# EAGLE board gat8 rev 1 (EAGLE 6.1)
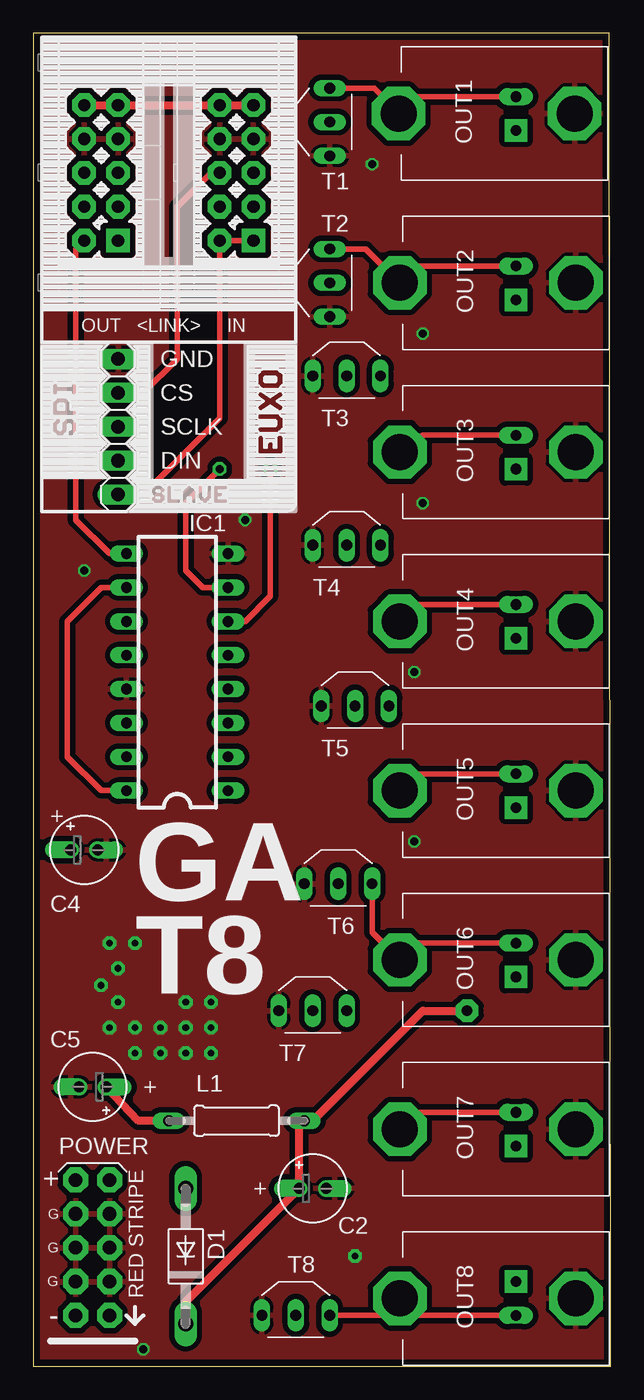
[diagram p0: board, top side]
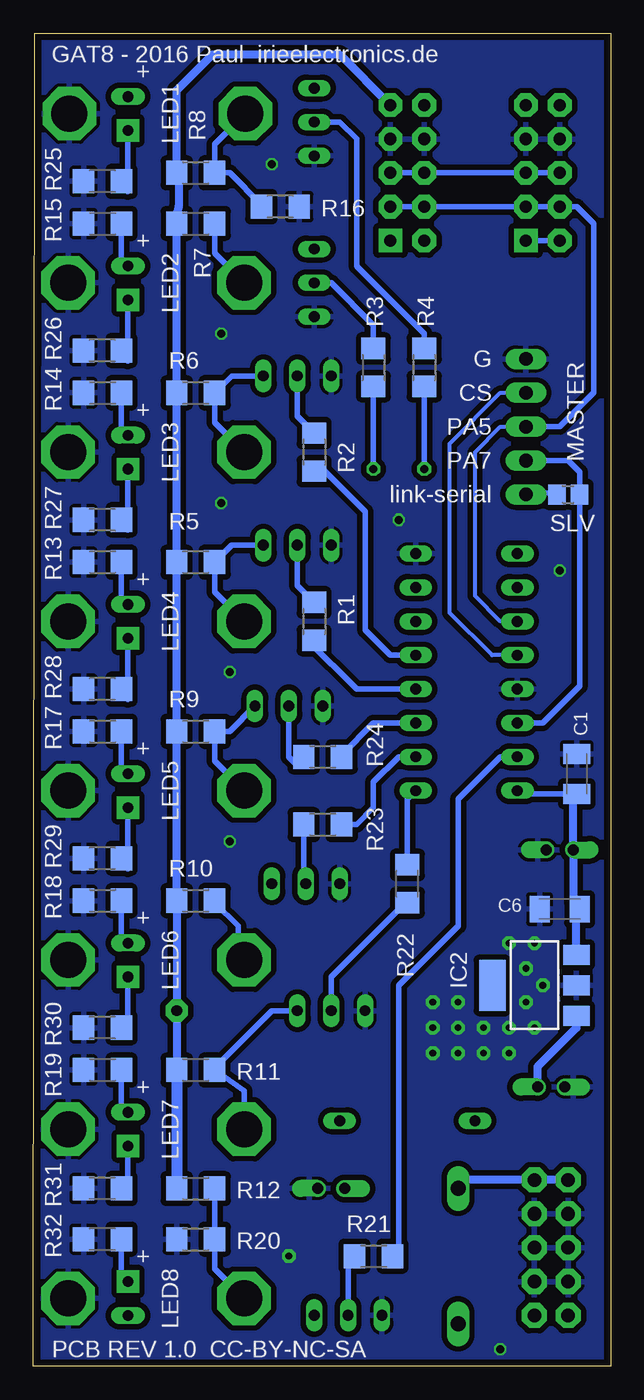
[diagram p1: board, bottom side, seen from below]

Size 43.29 x 100 mm. Coordinates in mm from the lower left corner, seen from the top.
Outline: 0,0 43.29,0 43.19,100 0,100 0,0
Copper layers (1*2*15*16): Top 0.035mm / dielectric 0.2mm / Route2 0.035mm / dielectric 1.2mm / Route15 0.035mm / dielectric 0.2mm / Bottom 0.035mm
Design rules: minimum track width 6mil, minimum drill 12mil, track to track 6mil, track to pad 8mil, pad to pad 12mil, via to via 6mil, smd to smd 0mil, copper to edge 20mil, drill to drill 10mil, minimum pad ring 6mil, minimum via ring 6mil, stop-mask expansion 0mil, vias tented up to drill 100mil, thermal gap 10mil

## Footprints (pad centres in the part's own frame; a part is rotated, then mirrored left to right if it is on the bottom)
C1206K = smd 1.5 x 2: 1 -1.5,0; 2 1.5,0
E2-5 = drill 0.813 pad 1.27 offset: + -1.016,0; - 1.016,0
DO41-10 = drill 1.118 long: A 5.08,0; C -5.08,0
DIL16 = drill 0.813 long: 1 -8.89,-3.81; 2 -6.35,-3.81; 3 -3.81,-3.81; 4 -1.27,-3.81; 5 1.27,-3.81; 6 3.81,-3.81; 7 6.35,-3.81; 8 8.89,-3.81; 9 8.89,3.81; 10 6.35,3.81; 11 3.81,3.81; 12 1.27,3.81; 13 -1.27,3.81; 14 -3.81,3.81; 15 -6.35,3.81; 16 -8.89,3.81
SOT223 = smd 1.5 x 2: 1 -2.3,-3.15; 2 0,-3.15; 3 2.3,-3.15 | smd 3.8 x 2: 4 0,3.15
ML10 = drill 0.914 pad 1.778 square: 1 -5.08,-1.27 | drill 0.914 pad 1.778 octagon: 2 -5.08,1.27; 3 -2.54,-1.27; 4 -2.54,1.27; 5 0,-1.27; 6 0,1.27; 7 2.54,-1.27; 8 2.54,1.27; 9 5.08,-1.27; 10 5.08,1.27
0207/10 = drill 0.813 long: 1 -5.08,0; 2 5.08,0
LED = drill 0.8 pad 1.676 square: GND 0,1.27 | drill 0.8 pad 1.27 long: S 0,-1.27
1X05 = drill 1.016 long: 1 -5.08,0; 2 -2.54,0; 3 0,0; 4 2.54,0; 5 5.08,0
PJ302M = drill 2.7 pad 4 octagon: GND 2.5,0; S 15.7,0
EURO_PWR_HEADER_FAT = drill 1.016 pad 1.88 octagon: 1 -5.08,-1.27; 2 -5.08,1.27; 3 -2.54,-1.27; 4 -2.54,1.27; 5 0,-1.27; 6 0,1.27; 7 2.54,-1.27; 8 2.54,1.27; 9 5.08,-1.27; 10 5.08,1.27
R1206 = smd 1.6 x 1.803: 1 -1.422,0; 2 1.422,0
R0805 = smd 1.3 x 1.5: 1 -0.85,0; 2 0.85,0
TO92 = drill 0.813 long: 1 2.54,0; 2 0,0; 3 -2.54,0

## Placement (x,y rotation side)
C1  100nF  [C1206K]  2.54,44.45 90 bottom
C2  47uF  [E2-5]  20.96,13.34 0 top
C4  47uF  [E2-5]  3.81,38.73 0 top
C5  47uF  [E2-5]  4.45,20.95 180 top
C6  100nF  [C1206K]  3.81,34.29 180 bottom
D1  1N4001  [DO41-10]  11.43,8.26 90 top
IC1  74LS595N  [DIL16]  10.79,52.07 90 top
IC2  LM117-3.3V  [SOT223]  5.71,28.57 90 bottom
IN  [ML10]  15.24,89.53 90 top
L1  [0207/10]  15.24,18.41 180 top
LED8  LED  [LED]  36.2,5.08 0 bottom
MASTER  [1X05]  6.35,70.48 90 top
OUT  [ML10]  5.08,89.53 90 top
OUT1  PJ302M  [PJ302M]  43.09,93.98 180 top
OUT2  PJ302M  [PJ302M]  43.19,81.28 180 top
OUT3  PJ302M  [PJ302M]  43.19,68.58 180 top
OUT4  PJ302M  [PJ302M]  43.19,55.88 180 top
OUT5  PJ302M  [PJ302M]  43.19,43.18 180 top
OUT6  PJ302M  [PJ302M]  43.19,30.48 180 top
OUT7  PJ302M  [PJ302M]  43.19,17.78 180 top
OUT8  PJ302M  [PJ302M]  43.19,5.08 180 top
POWER  EURO_POWER_HEADERFAT_PADS  [EURO_PWR_HEADER_FAT]  4.45,8.89 90 top
R1  [R1206]  22.23,55.88 90 bottom
R2  [R1206]  22.23,68.58 90 bottom
R3  [R1206]  17.78,74.93 90 bottom
R4  [R1206]  13.97,74.93 90 bottom
R5  [R1206]  31.11,60.33 180 bottom
R6  [R1206]  31.11,73.03 180 bottom
R7  [R1206]  31.11,85.72 180 bottom
R8  [R1206]  31.11,89.53 180 bottom
R9  [R1206]  31.11,47.62 180 bottom
R10  [R1206]  31.11,34.92 180 bottom
R11  [R1206]  31.11,22.23 180 bottom
R12  [R1206]  31.11,13.34 180 bottom
R13  [R1206]  38.1,60.33 180 bottom
R14  [R1206]  38.1,73.03 180 bottom
R15  [R1206]  38.1,85.72 180 bottom
R16  [R1206]  24.77,87 0 bottom
R17  [R1206]  38.1,47.62 180 bottom
R18  [R1206]  38.1,34.92 180 bottom
R19  [R1206]  38.1,22.23 180 bottom
R20  [R1206]  31.11,9.53 180 bottom
R21  [R1206]  17.78,8.26 180 bottom
R22  [R1206]  15.24,36.2 270 bottom
R23  [R1206]  21.59,40.64 180 bottom
R24  [R1206]  21.59,45.72 180 bottom
R25  2,2K  [R1206]  38.1,88.9 0 bottom
R26  2,2K  [R1206]  38.1,76.2 0 bottom
R27  2,2K  [R1206]  38.1,63.5 0 bottom
R28  2,2K  [R1206]  38.1,50.8 0 bottom
R29  2,2K  [R1206]  38.1,38.1 0 bottom
R30  2,2K  [R1206]  38.1,25.4 0 bottom
R31  2,2K  [R1206]  38.1,13.34 0 bottom
R32  2,2K  [R1206]  38.1,9.53 0 bottom
SLV  [R0805]  3.18,65.41 0 bottom
T1  2N3904  [TO92]  22.23,93.34 90 top
T2  2N3904  [TO92]  22.23,81.28 90 top
T3  2N3904  [TO92]  23.5,74.3 0 top
T4  2N3904  [TO92]  23.5,61.59 0 top
T5  2N3904  [TO92]  24.13,49.53 0 top
T6  2N3904  [TO92]  22.86,36.2 0 top
T7  2N3904  [TO92]  20.96,26.67 0 top
T8  2N3904  [TO92]  19.69,3.81 0 top
U$1  LED  [LED]  36.2,93.98 180 bottom
U$2  LED  [LED]  36.2,81.28 180 bottom
U$3  LED  [LED]  36.2,68.58 180 bottom
U$4  LED  [LED]  36.2,55.88 180 bottom
U$5  LED  [LED]  36.2,43.18 180 bottom
U$6  LED  [LED]  36.2,30.48 180 bottom
U$7  LED  [LED]  36.2,17.78 180 bottom
U$9  LABEL_COMPLETE  [LABELCOMPLETE]  20.32,63.5 0 top

## Library data of the parts
C1 C2 C4-C6 L1 R1-R32 SLV = resistor-mod
D1 = diode
IC1 = SparkFun-DigitalIC
IC2 = v-reg mod
IN OUT = con-ml; OC_FARNELL: unknown; OC_NEWARK: unknown
LED8 U$1-U$7 = LED
MASTER = pinhead 2
OUT1-OUT8 = PJ203M 3.5mm
POWER = MusicThingModular mod
T1-T8 = transistor
U$9 = labels links

## Nets
+3V3: C1.1 C4.+ C6.1 IC1.10 IC1.16 IC2.3
+12V: C2.+ D1.C IN.9 IN.10 L1.1 OUT.9 OUT.10 R5.2 R6.2 R7.2 R8.2 R9.2 R10.2 R11.2 R12.2
CS: IC1.12 IN.5 IN.6 MASTER.4 OUT.5 OUT.6
EXT_SERIAL: IN.1 IN.2 MASTER.1 SLV.1
GATE1: R4.2 T1.2
GATE2: R3.2 T2.2
GATE3: R2.2 T3.2
GATE4: R1.2 T4.2
GATE5: R24.2 T5.2
GATE6: R23.2 T6.2
GATE7: R22.2 T7.2
GATE8: R21.2 T8.2
GND: C1.2 C2.- C4.- C5.- C6.2 IC1.8 IC1.13 IC2.2 IN.7 IN.8 MASTER.5 OUT1.GND OUT2.GND OUT3.GND OUT4.GND OUT5.GND OUT6.GND OUT7.GND OUT8.GND OUT.7 OUT.8 POWER.3 POWER.4 POWER.5 POWER.6 POWER.7 POWER.8 R13.2 R14.2 R15.2 R16.2 R17.2 R18.2 R19.2 R20.2 R25.1 R26.1 R27.1 R28.1 R29.1 R30.1 R31.1 R32.1 T1.3 T2.3 T3.3 T4.3 T5.3 T6.3 T7.3 T8.3
N$1: D1.A POWER.9 POWER.10
N$2: R26.2 U$2.GND
N$12: R25.2 U$1.GND
N$13: R27.2 U$3.GND
N$14: R28.2 U$4.GND
N$15: LED8.GND R32.2
N$16: R31.2 U$7.GND
N$17: R30.2 U$6.GND
N$18: R29.2 U$5.GND
OUT1: OUT1.S R8.1 R16.1 T1.1 U$1.S
OUT2: OUT2.S R7.1 R15.1 T2.1 U$2.S
OUT3: OUT3.S R6.1 R14.1 T3.1 U$3.S
OUT4: OUT4.S R5.1 R13.1 T4.1 U$4.S
OUT5: OUT5.S R9.1 R17.1 T5.1 U$5.S
OUT6: OUT6.S R10.1 R18.1 T6.1 U$6.S
OUT7: OUT7.S R11.1 R19.1 T7.1 U$7.S
OUT8: LED8.S OUT8.S R12.1 R20.1 T8.1
PA5: IC1.11 IN.3 IN.4 MASTER.3 OUT.3 OUT.4
PA7: IC1.14 MASTER.2 SLV.2
QA: IC1.15 R21.1
QB: IC1.1 R22.1
QC: IC1.2 R23.1
QD: IC1.3 R24.1
QE: IC1.4 R1.1
QF: IC1.5 R2.1
QG: IC1.6 R3.1
QH: IC1.7 R4.1
SERIAL_OUT: IC1.9 OUT.1 OUT.2
VCC: C5.+ IC2.1 L1.2

## Tracks (layer width: path | path; a pad name or v marks a point on that pad's centre or on a via)
+3V3
  Top 0.406: IC1.16 5.08,43.18 2.54,45.72 2.54,55.88 5.08,58.42 IC1.10
  Bottom 0.406: C1.1 6.75,42.95
  Bottom 0.61: 6.75,42.95 IC1.16 | IC2.3 2.56,34.03 C6.1 2.79,34.77 C4.+ 2.79,42.7 C1.1
+12V  (via drill 0.8 pad 1.68)
  Top 0.61: v32.54,26.67 29.21,26.67 20.96,18.41 L1.1 19.94,18.03 C2.+ 11.43,4.83 D1.C | OUT.10 OUT.9 IN.10 IN.9
  Bottom 0.61: R11.2 v32.54,26.67 R10.2 R9.2 R5.2 R6.2 R7.2 32.54,86.51 32.38,87 32.38,89.53 R8.2 32.54,95.73 29.85,98.42 20.32,98.42 IN.9
  Bottom 0.813: R11.2 R12.2 32.38,13.34
CS
  Top 0.406: MASTER.4 8.25,73.03 10.79,75.56 10.79,87 13.33,89.53 IN.6
  Bottom 0.305: IC1.12 8.89,53.34 12.06,56.52 12.06,69.22 8.25,73.03 MASTER.4
  Bottom 0.406: IN.5 IN.6 OUT.5 OUT.6
EXT_SERIAL
  Top 0.406: MASTER.1 8.25,65.41 13.97,71.12 IN.2 IN.1
  Bottom 0.406: SLV.1 5.29,65.62 MASTER.1
GATE1
  Bottom 0.406: T1.2 20.32,93.34 19.05,92.08 19.05,82.55 13.97,77.47 R4.2 13.97,76.2
GATE2
  Bottom 0.406: R3.2 17.78,78.11 20.96,81.28 T2.2
GATE3
  Bottom 0.406: T3.2 23.5,71.27 R2.2
GATE4
  Bottom 0.406: T4.2 23.5,58.57 R1.2
GATE5
  Bottom 0.406: R24.2 23.5,45.09 24.13,45.72 T5.2
GATE6
  Bottom 0.406: R23.2 23.01,36.35 T6.2
GATE7
  Bottom 0.406: R22.2 15.39,34.77 20.96,29.21 T7.2
GATE8
  Bottom 0.406: R21.2 19.2,8.1 19.69,7.62 T8.2
GND  (via drill 0.5 pad 1.02, 0.6)
  other vias: 5.71,31.75 8.25,1.27 3.81,59.69 15.87,63.5 29.21,64.77 29.21,77.47 25.4,90.17 28.57,52.07 28.57,39.37 6.35,29.84 5.08,28.57 5.71,25.4 6.35,27.3 7.62,31.75 11.43,27.3 11.43,25.4 9.53,25.4 7.62,25.4 11.43,23.5 9.53,23.5 7.62,23.5 13.33,23.5 13.33,25.4 13.33,27.3 24.13,8.26
  pour Bottom (isolate 0.406): 0,99.69 0,0 42.54,0 42.54,99.69
  pour Top (isolate 0.406): 0,99.69 0,0 43.18,0 43.18,99.69
N$1
  Bottom 0.61: POWER.10 POWER.9 11.43,13.97 D1.A
N$2
  Bottom 0.406: U$2.GND 36.2,75.41 R26.2
N$12
  Bottom 0.406: U$1.GND 36.2,88.11 R25.2
N$13
  Bottom 0.406: U$3.GND 36.2,62.71 R27.2
N$14
  Bottom 0.406: U$4.GND 36.2,50.01 R28.2
N$15
  Bottom 0.406: R32.2 36.68,6.83 LED8.GND
N$16
  Bottom 0.406: U$7.GND 36.2,13.82 R31.2
N$17
  Bottom 0.406: U$6.GND 36.2,25.88 R30.2
N$18
  Bottom 0.406: U$5.GND 36.2,37.31 R29.2
OUT1
  Top 0.406: U$1.S 28.75,95.25 OUT1.S 25.58,95.89 T1.1
  Bottom 0.406: OUT1.S 29.69,91.68 R8.1 28.57,89.53 26.19,87.15 R16.1
OUT2
  Top 0.406: T2.1 24.94,83.82 OUT2.S 28.75,82.55 U$2.S
  Bottom 0.406: R15.1 36.68,83.03 U$2.S | R7.1 29.69,83.49 OUT2.S
OUT3
  Top 0.406: OUT3.S 27.94,68.58 29.21,69.85 U$3.S
  Bottom 0.406: R14.1 36.68,70.33 U$3.S | OUT3.S 29.69,70.79 R6.1 28.42,74.3 T3.1
OUT4
  Top 0.406: U$4.S 28.75,57.15 OUT4.S
  Bottom 0.406: R13.1 36.68,57.63 U$4.S | OUT4.S 29.69,58.09 R5.1 28.42,61.59 T4.1
OUT5
  Top 0.406: U$5.S 28.75,44.45 OUT5.S
  Bottom 0.406: OUT5.S 29.69,45.39 R9.1 28.57,47.62 T5.1 | R17.1 36.68,44.93 U$5.S
OUT6
  Top 0.406: U$6.S 28.75,31.75 OUT6.S 25.4,32.56 T6.1
  Bottom 0.406: R18.1 36.68,32.23 U$6.S | R10.1 29.69,34.77 27.94,33.02 27.94,31.11 27.3,30.48 OUT6.S
OUT7
  Top 0.406: U$7.S 28.75,19.05 OUT7.S
  Bottom 0.406: OUT7.S 27.48,20.65 R11.1 29.69,22.38 25.4,26.67 T7.1 | R19.1 36.68,19.53 U$7.S
OUT8
  Top 0.406: LED8.S 28.75,3.81 OUT8.S 26.22,3.81 T8.1
  Bottom 0.406: R12.1 R20.1 29.69,7.29 OUT8.S
PA5
  Bottom 0.305: IC1.11 8.25,55.88 10.16,57.78 10.16,68.58 8.25,70.48 MASTER.3
  Bottom 0.406: IN.3 IN.4 OUT.3 OUT.4 2.54,87 1.27,85.72 1.27,73.03 3.81,70.48 MASTER.3
PA7
  Bottom 0.406: IC1.14 5.08,48.26 2.32,51.02 SLV.2 2.32,67.09 3.18,67.94 MASTER.2
QA
  Bottom 0.406: IC1.15 8.25,45.72 11.43,42.55 11.43,33.02 15.87,28.57 15.87,8.74 R21.1
QB
  Bottom 0.406: R22.1 15.24,42.55 IC1.1
QC
  Bottom 0.406: IC1.2 15.87,45.72 17.78,43.81 17.78,41.91 19.05,40.64 R23.1
QD
  Bottom 0.406: R24.1 20.17,45.87 17.78,48.26 IC1.3
QE
  Bottom 0.406: R1.1 22.71,54.46 19.05,50.8 IC1.4
QF
  Bottom 0.406: IC1.5 16.51,53.34 18.42,55.24 18.42,64.14 21.44,67.16 R2.1
QG  (via drill 0.6 pad 1.02)
  Top 0.406: IC1.6 15.87,55.88 17.78,57.78 v17.78,67.31
  Bottom 0.406: R3.1 v17.78,67.31
QH  (via drill 0.6 pad 1.02)
  Top 0.406: IC1.7 12.7,58.42 11.43,59.69 11.43,64.77 v13.97,67.31
  Bottom 0.406: R4.1 v13.97,67.31
SERIAL_OUT
  Top 0.406: OUT.2 3.18,83.82 3.18,63.5 5.71,60.96 IC1.9
  Bottom 0.406: OUT.2 OUT.1
VCC
  Top 0.61: L1.2 7.87,18.41 C5.+
  Bottom 0.61: IC2.1 2.56,25.38 5.46,22.48 C5.+

## Text on the board
tPlace: OUT | <LINK> | IN | GND | CS | SCLK | DIN | + | + | POWER | +
bPlace: + | + | G | CS | + | PA5 | PA7 | link-serial | + | + | + | + | +
tNames: GA | T8
bNames: GAT8 - 2016 Paul irieelectronics.de | LED1 | LED2 | LED3 | LED4 | LED5 | LED6 | LED7 | LED8 | PCB REV 1.0 CC-BY-NC-SA